# EAGLE board Tiny841 (EAGLE 7.4.0)
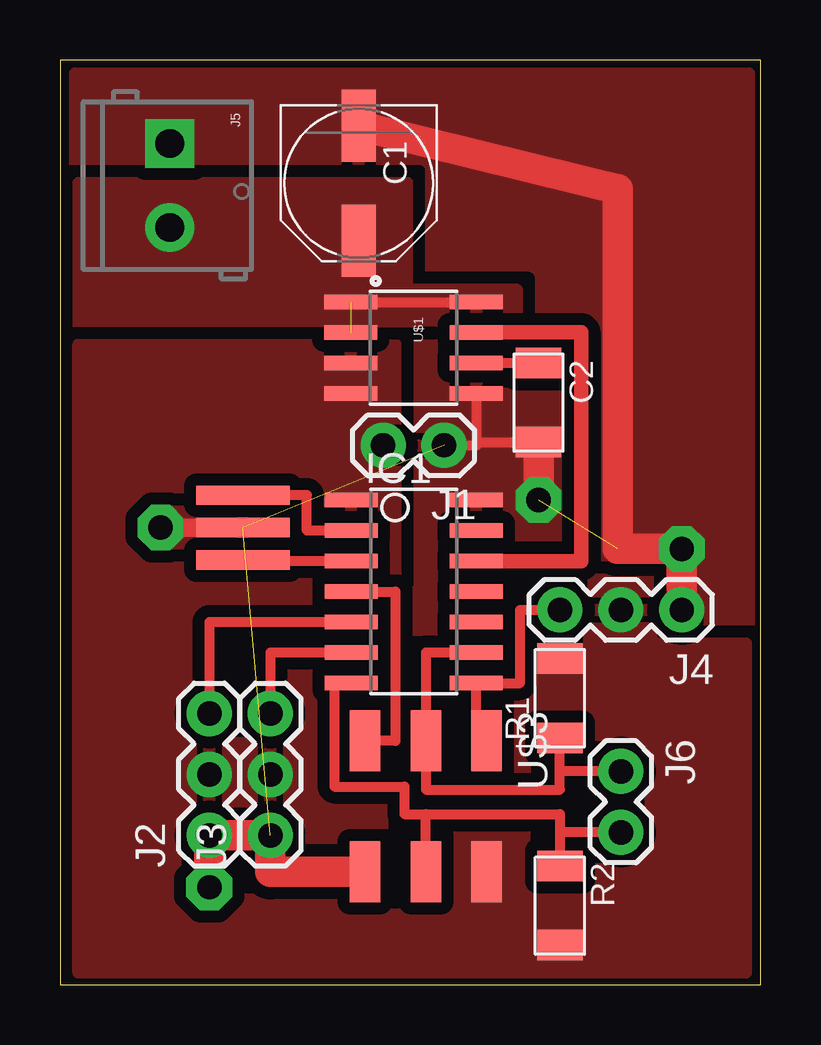
[diagram p0: board, top side]

Size 29.19 x 38.53 mm. Coordinates in mm from the lower left corner, seen from the top.
Outline: 0,0 29.19,0 29.19,38.53 0,38.53 0,0
Copper layers (1*16): Top 0.035mm / dielectric 1.5mm / Bottom 0.035mm
Design rules "default *": minimum track width 10mil, minimum drill 24mil, track to track 20mil, track to pad 20mil, pad to pad 20mil, via to via 20mil, smd to smd 20mil, copper to edge 0mil, drill to drill 8mil, minimum pad ring 10mil, minimum via ring 8mil, stop-mask expansion 4mil, vias tented up to drill 0mil, thermal gap 0mil

## Footprints (pad centres in the part's own frame; a part is rotated, then mirrored left to right if it is on the bottom)
PANASONIC_D = smd 3 x 1.4: + 2.4,0; - -2.4,0
C1206FAB = smd 1.27 x 1.905: 1 -1.651,0; 2 1.651,0
SOIC14 = smd 0.61 x 2.21: 1 -3.81,-2.603; 2 -2.54,-2.603; 3 -1.27,-2.603; 4 0,-2.603; 5 1.27,-2.603; 6 2.54,-2.603; 7 3.81,-2.603; 8 3.81,2.603; 9 2.54,2.603; 10 1.27,2.603; 11 0,2.603; 12 -1.27,2.603; 13 -2.54,2.603; 14 -3.81,2.603
1X02 = drill 1.016 pad 1.88: 1 0,0; 2 2.54,0
1X03 = drill 1.016 pad 1.88: 1 0,0; 2 2.54,0; 3 5.08,0
SCREWTERMINAL-3.5MM-2-NS = drill 1.2 pad 2.032 square: 1 0,0 | drill 1.2 pad 2.032: 2 3.5,0
R1206FAB = smd 1.27 x 1.905: 1 -1.651,0; 2 1.651,0
SO08 = smd 0.61 x 2.21: 1 -1.905,-2.616; 2 -0.635,-2.616; 3 0.635,-2.616; 4 1.905,-2.616; 5 1.905,2.616; 6 0.635,2.616; 7 -0.635,2.616; 8 -1.905,2.616
EFOBM = smd 0.8 x 3.9: 1 -1.35,0; 2 0,0; 3 1.35,0
2X03SMD = smd 2.54 x 1.27: 1 -2.54,2.54; 2 2.92,2.54; 3 -2.54,0; 4 2.92,0; 5 -2.54,-2.54; 6 2.92,-2.54

## Placement (x,y rotation side)
C1  [PANASONIC_D]  12.45,33.4 270 top
C2  CAP-UNPOLARIZEDFAB  [C1206FAB]  19.94,24.26 270 top
IC1  ATTINY44-SSU  [SOIC14]  14.73,16.38 270 top
J1  [1X02]  16,22.48 180 top
J2  [1X03]  6.22,6.22 90 top
J3  [1X03]  8.76,6.22 90 top
J4  [1X03]  25.91,15.62 180 top
J5  [SCREWTERMINAL-3.5MM-2-NS]  4.57,35.05 270 top
J6  [1X02]  23.37,8.89 270 top
R1  [R1206FAB]  20.83,11.94 90 top
R2  [R1206FAB]  20.83,3.3 270 top
U$1  ACS712  [SO08]  14.73,26.54 270 top
U$2  RESONATOR  [EFOBM]  7.62,19.05 270 top
U$3  AVRISPSMD  [2X03SMD]  15.24,7.62 270 top

## Library data of the parts
C1 = SparkFun-Capacitors; PROD_ID: CAP-10547
C2 IC1 R1 R2 U$2 U$3 = fab
J1-J4 J6 = SparkFun-Connectors
J5 = SparkFun-Connectors; PROD_ID: CONN-08399
U$1 = SparkFun-AnalogIC; PROD_ID: IC-08964

## Nets
CURSENSE: IC1.12 U$1.7
GND: C1.- C2.2 IC1.14 J1.1 J2.1 J3.1 J4.1 J5.1 U$1.5 U$2.2 U$3.6
MOTSIG0: IC1.5 J2.3
MOTSIG1: IC1.6 J3.3
MOTSIG2: IC1.8 J4.3 U$3.1
N$5: IC1.3 U$2.3
N$6: IC1.2 U$2.1
N$8: C2.1 U$1.6
RESET: IC1.4 U$3.5
SCL: IC1.9 J6.1 R1.1 U$3.3
SDA: IC1.7 J6.2 R2.1 U$3.4
VCC: IC1.1 J1.2 J2.2 J3.2 J4.2 R1.2 R2.2 U$1.3 U$1.4 U$3.2
VCC_RAW: C1.+ J5.2 U$1.1 U$1.2 U$1.8

## Tracks (layer width: path | path; a pad name or v marks a point on that pad's centre or on a via)
CURSENSE
  Top 0.61: U$1.7 21.72,27.18 21.72,17.65 IC1.12
GND  (via drill 1.02 pad 1.91)  (3 unrouted)
  Top 0.406: J1.1 17.35,22.48 17.35,22.61 | U$1.5 17.35,22.61 | 17.35,22.61 C2.2
  Top 0.762: U$2.2 v4.19,19.05
  Top 1.27: U$3.6 8.76,4.7 J3.1 J2.1 v6.22,4.06 | J4.1 v25.91,18.16 23.24,18.16 23.24,33.15 C1.- | C2.2 v19.94,20.19
  pour Top (rank 3): 0.64,37.97 28.7,37.97 28.7,14.35 0.64,14.1
MOTSIG0
  Top 0.406: IC1.5 6.22,15.11 J2.3
MOTSIG1
  Top 0.406: IC1.6 8.76,13.84 J3.3
MOTSIG2
  Top 0.406: U$3.1 17.34,10.16 IC1.8 19.18,12.57 19.18,15.62 J4.3
N$5
  Top 0.406: IC1.3 7.49,17.65 U$2.3
N$6
  Top 0.406: IC1.2 10.29,18.92 10.29,20.4 U$2.1
N$8
  Top 0.406: U$1.6 C2.1 19.56,25.53
RESET
  Top 0.406: IC1.4 13.97,16.38 13.97,10.16 U$3.5
SCL
  Top 0.406: 20.83,8.89 20.83,8.13 15.24,8.13 U$3.3 15.24,13.84 IC1.9 | 20.83,8.89 R1.1 | J6.1 20.83,8.89
SDA
  Top 0.406: U$3.4 15.24,7.11 | 15.24,7.11 20.83,7.11 20.83,6.35 | J6.2 20.83,6.35 | 20.83,6.35 R2.1 | IC1.7 11.43,12.57 11.43,8.25 14.35,8.25 14.35,7.11 15.24,7.11
VCC
  pour Top: 22.23,17.02 24.64,17.02 24.64,14.22 28.57,14.22 28.57,0.51 0.76,0.51 0.76,26.67 13.97,26.67 13.97,17.15 22.23,17.15
VCC_RAW  (1 unrouted)
  Top 0.406: U$1.1 U$1.8
  pour Top (rank 2): 0.76,26.16 14.73,26.54 14.73,27.69 19.05,27.69 19.05,28.96 14.48,28.96 14.48,33.4 0.76,33.4